# Altium PCB CopterControl 3D.PcbDoc (part 1 of 2)
Units mil, origin at the board's own origin, x right, y up, seen from the top; angles counter-clockwise.
Board outline 1417.32 x 1417.32 mil, 2 copper layers (Top Layer, Bottom Layer), stack 61.2 mil thick; 64 components, 58 nets, 262 pads, 81 vias.
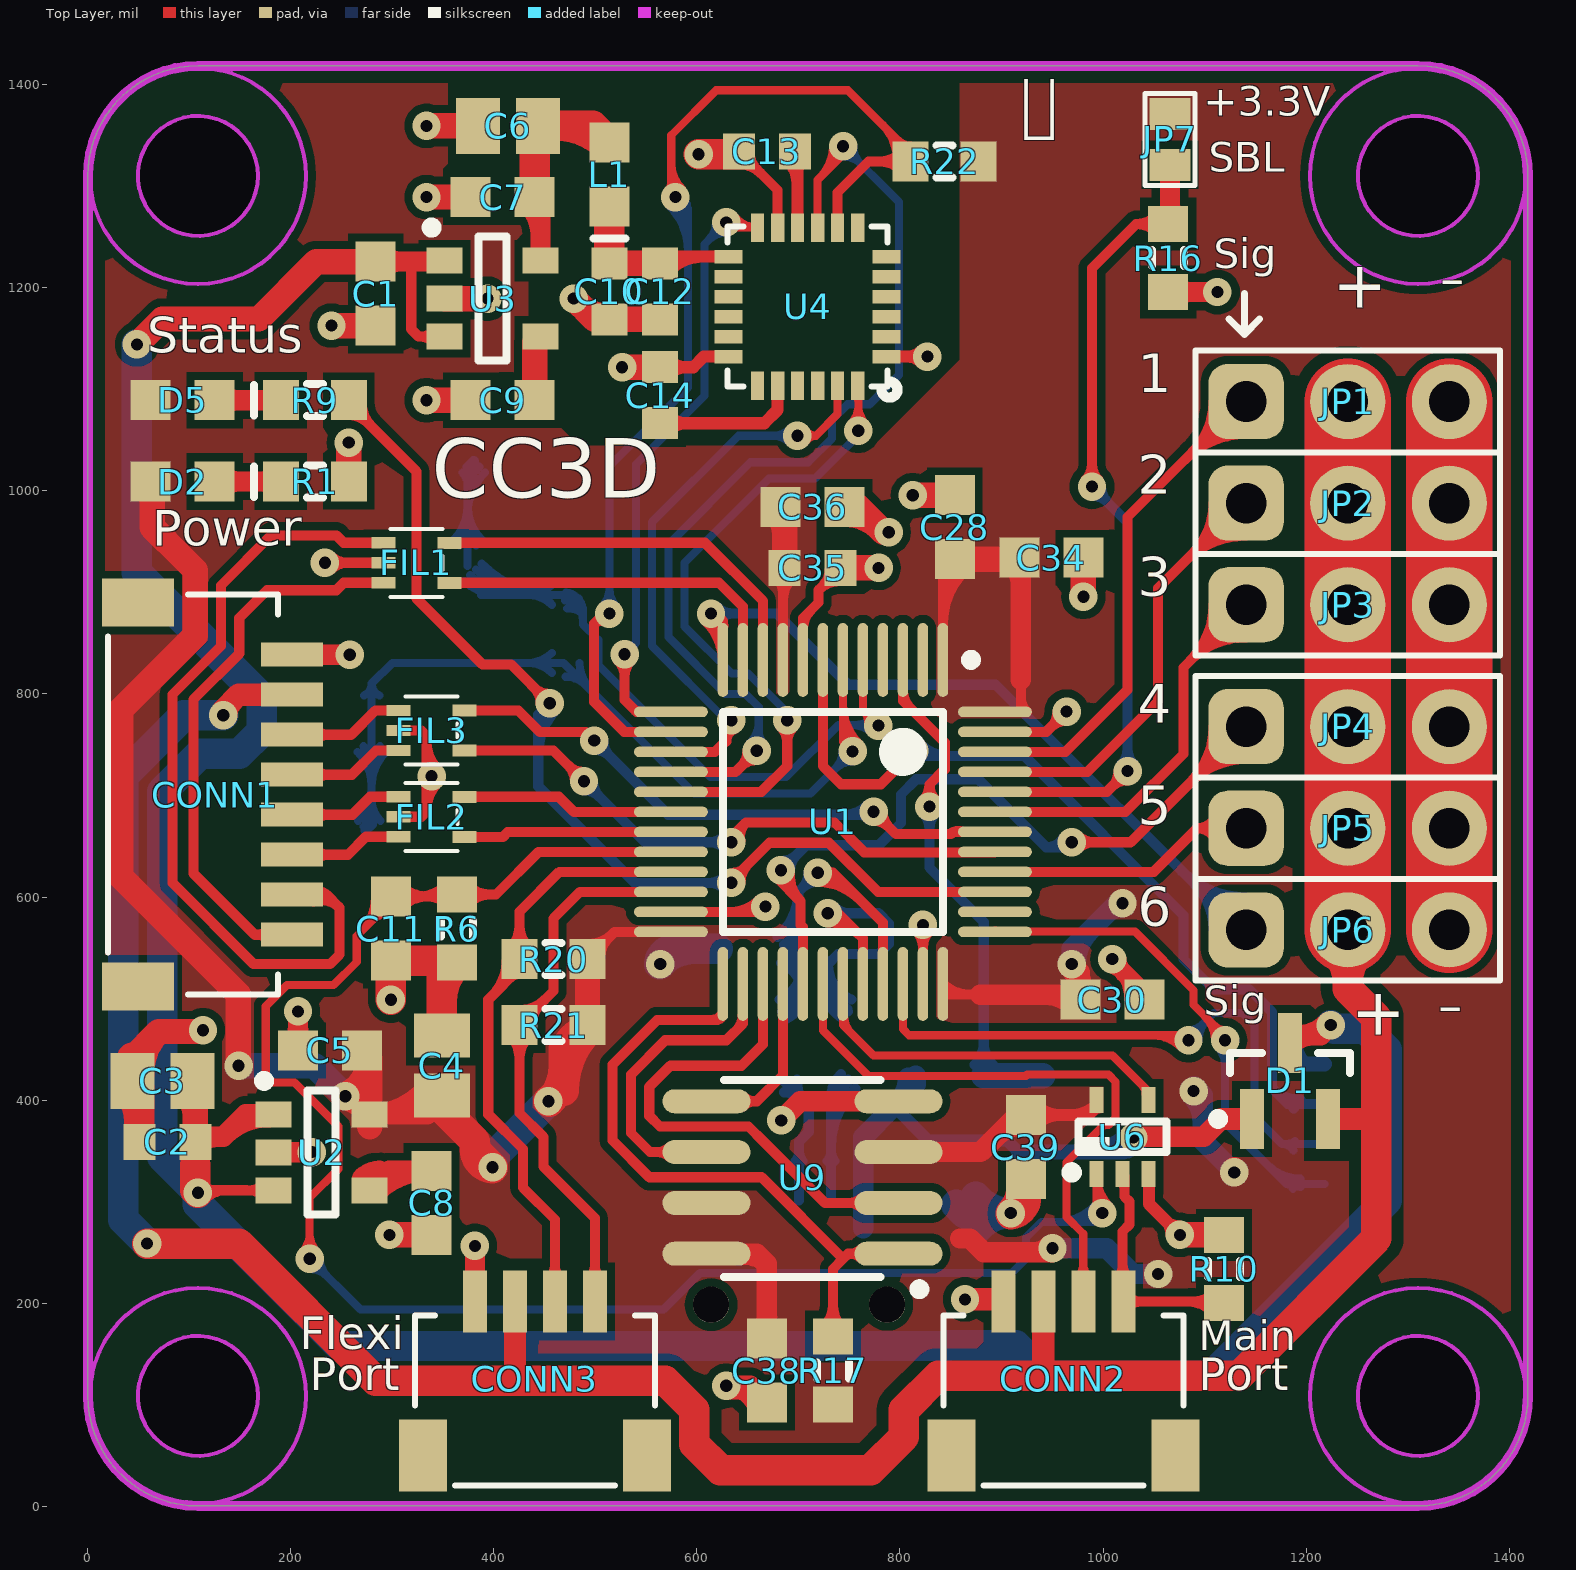
[diagram p0: Top Layer view]
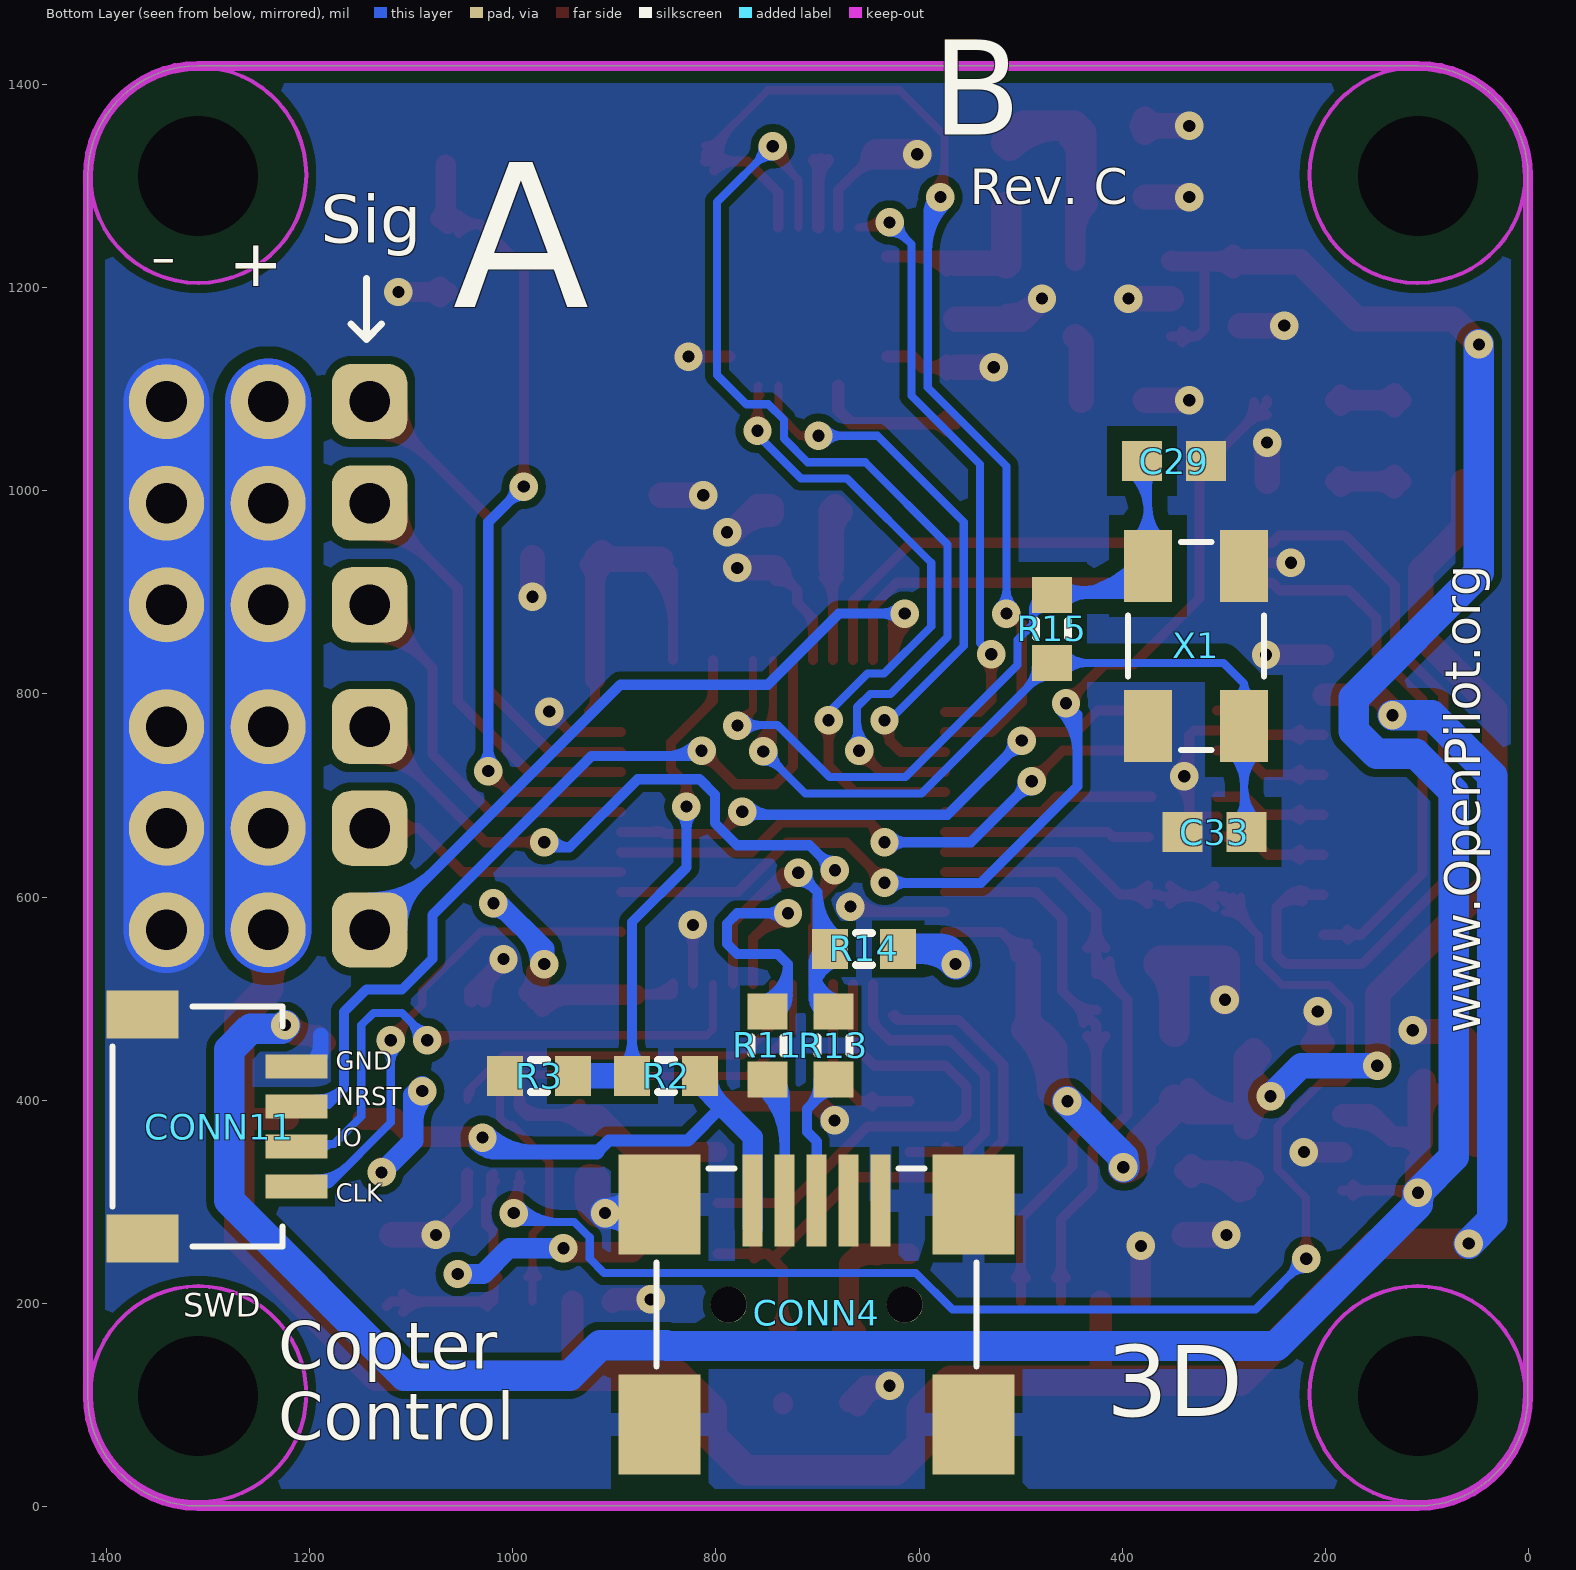
[diagram p1: Bottom Layer view, seen from below]
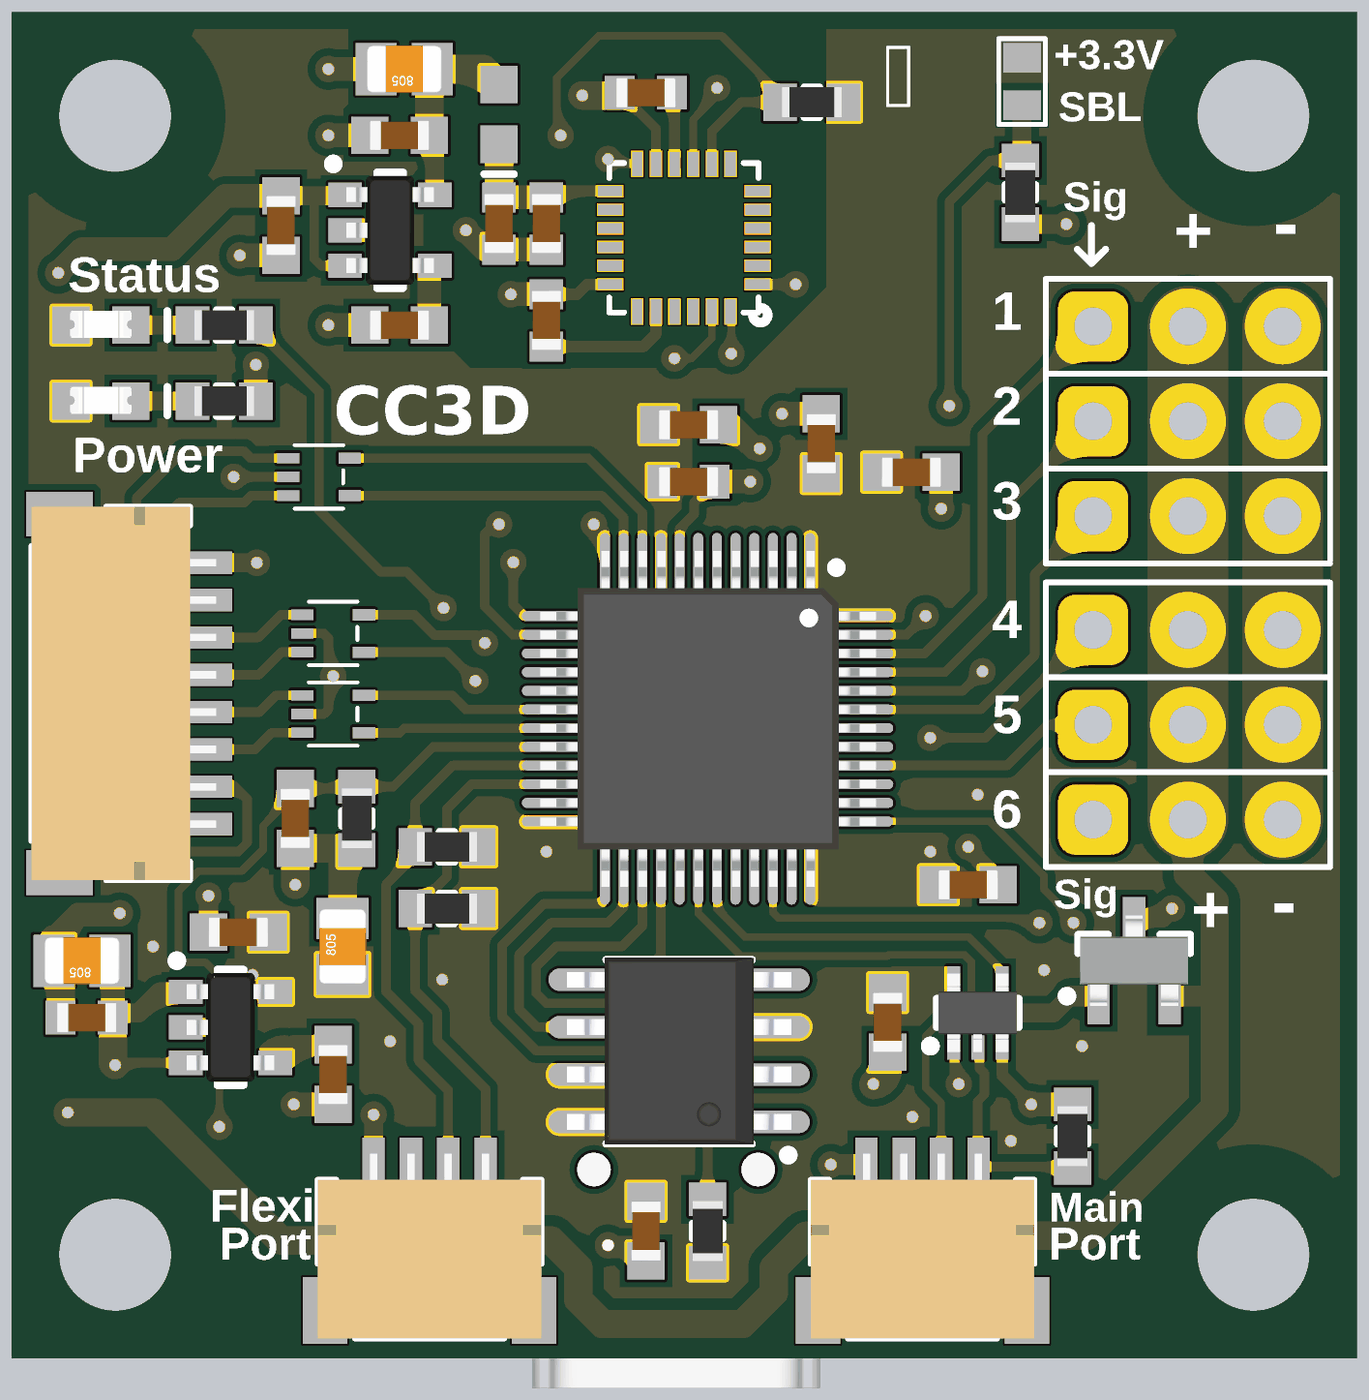
[diagram p3: 3D render of the assembled board from above, using the file's embedded part models]
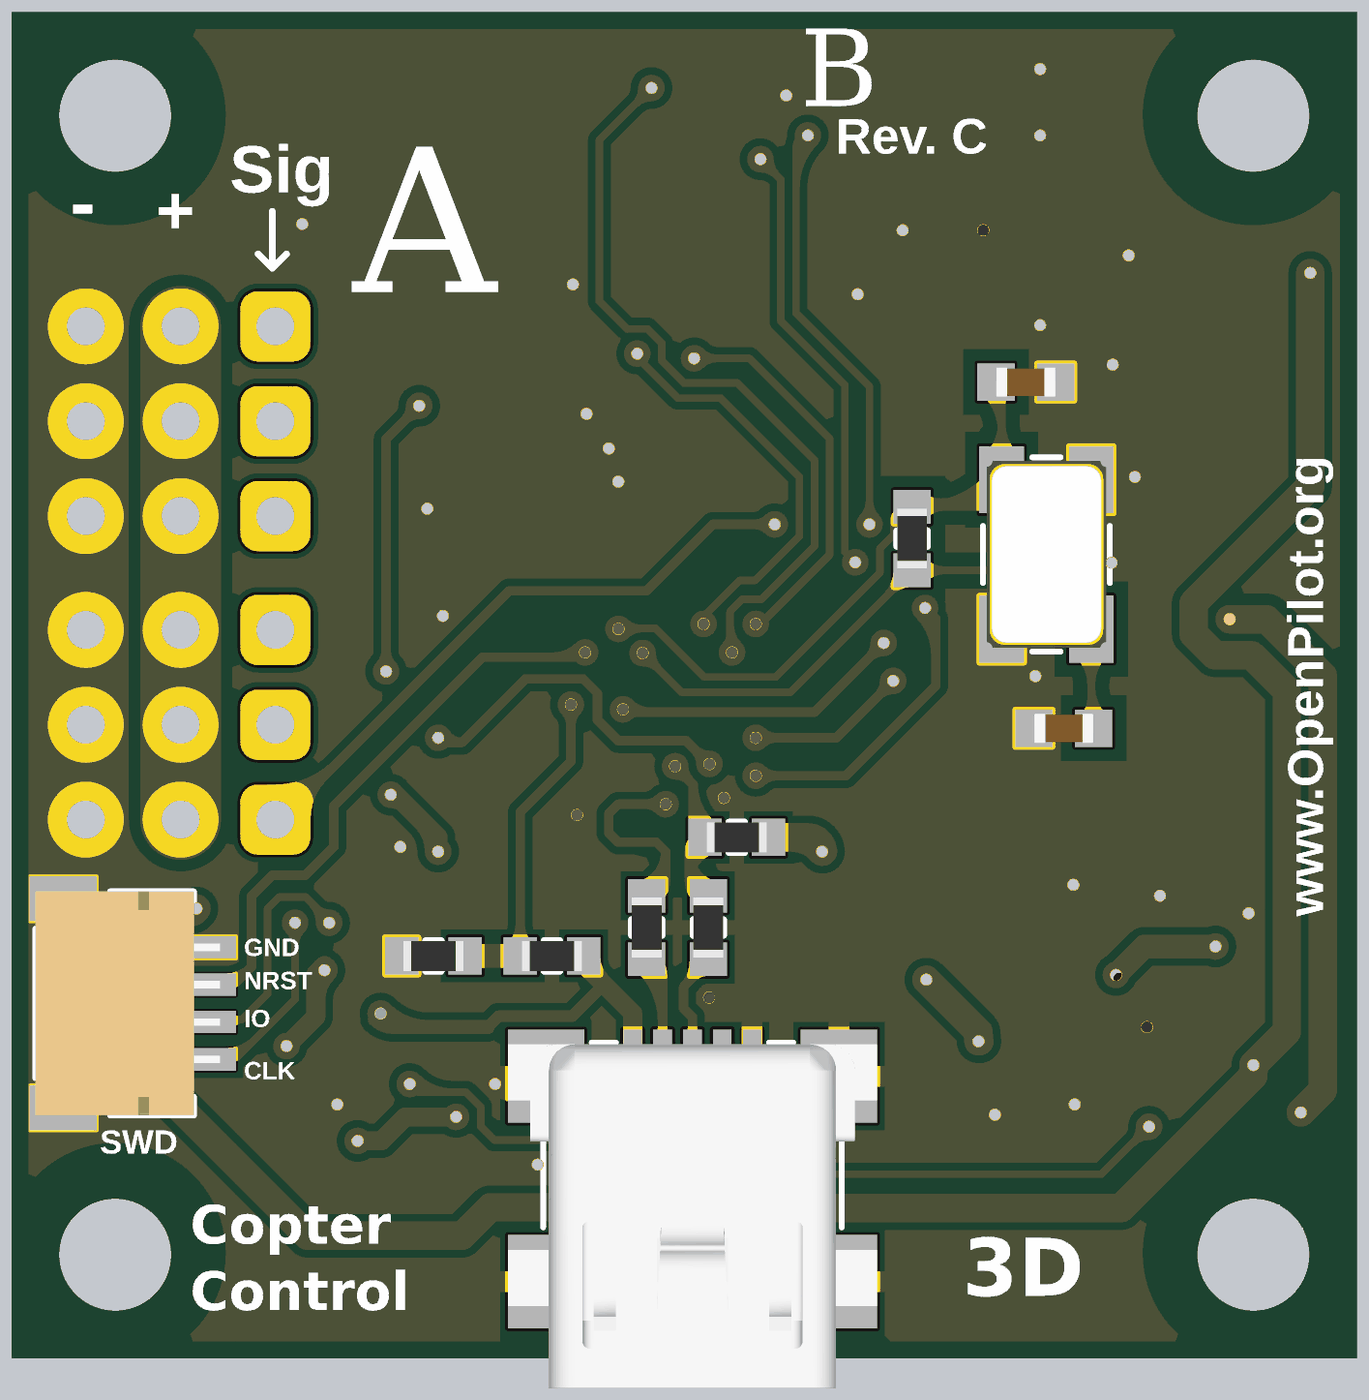
[diagram p4: 3D render of the assembled board from below, using the file's embedded part models]

## Layer stack, top to bottom
Top Layer: signal copper 1.4
Dielectric: core 58.4, FR-4, Dk 4.8
Bottom Layer: signal copper 1.4

## Board outline
0.73,109 ccw(c109,109) 109,0.73 1309.79,0.73 ccw(c1309.79,109) 1418.06,109 1418.06,1309.79 ccw(c1309.79,1309.79) 1309.79,1418.06 109,1418.06 ccw(c109,1309.79) 0.73,1309.79

## Design rules (kind name [scope] priority, off if disabled: settings)
AcuteAngle [All] p1: minimum=6.00000000000000E+0001 checktracksonly=FALSE
Clearance Clearance_osc [InNet('GND') vs InNet('OSC_IN') or InNet('OSC_OUT')] p1: gap=15
Clearance Clearance_outline [All vs OnLayer('Keep-Out Layer')] p2: gap=12
Clearance "VCC_UNREG Pour Clearance" [(InNamedPolygon('Top-VCC') OR InNamedPolygon('Bottom Layer-GND')) vs (InNet('VCC_UNREG'))] p3: gap=12
Clearance "Small Part Clearance" [(HasFootprint('IMU-3000'))] p4: gap=6
Clearance [All] p5: gap=8
ComponentClearance ComponentClearance_servo_headers [InComponent('JP1') or InComponent('JP2') or InComponent('JP3') or InComponent('JP4') or InComponent('JP5') or InComponent('JP6')] p1: gap=5 collisioncheckmode=3 verticalgap=10 showdistances=FALSE
ComponentClearance [All] p2: gap=10 collisioncheckmode=3 verticalgap=10 showdistances=FALSE
DiffPairsRouting [All] p1: maxlimit=20 minlimit=6 mostfreqgap=10 maxuncoupledlength=500
HoleSize [All] p1: absolutevalues=TRUE maxlimit=1000 minlimit=12 maxpercent=80.000 minpercent=20.000
MinimumAnnularRing [All] p1: minimumring=8
MinimumSolderMaskSliver MinimumSolderMaskSliver_FIL1-3 [InComponent('FIL1') or InComponent('FIL2') or InComponent('FIL3')] p1: minsoldermaskwidth=1
MinimumSolderMaskSliver [All] p2: minsoldermaskwidth=3
PlaneClearance [All] p1: clearance=15
PlaneConnect [All] p1: planeconnectstyle=Direct reliefexpansion=20 reliefentries=4 reliefconductorwidth=10 reliefairgap=10
PolygonConnect PolygonConnect_usb [InComponent('CONN4')] p1: connectstyle=Relief reliefconductorwidth=22 reliefentries=4 polygonreliefangle="90 Angle"
PolygonConnect [All] p2: connectstyle=Direct reliefconductorwidth=12 reliefentries=4 polygonreliefangle="90 Angle"
RoutingVias [All] p1: holewidth=15 width=31 viastyle="Through Hole" minholewidth=12 minwidth=28 maxholewidth=28 maxwidth=50
SilkToSilkClearance SilkToSilkClearance_text [IsText] p1: silktosilkclearance=0
SilkToSilkClearance [All] p2: silktosilkclearance=4
SilkscreenOverComponentPads [All] p1: minsilkscreentomaskgap=2
SolderMaskExpansion [All] p1: expansion=3
Width [All] p1: maxlimit=400 minlimit=8 preferedwidth=10
20 further rules are at their usual default settings.

## Classes and differential pairs
differential pair USB_R: +USB_R_P -USB_R_N
differential pair USB_D: +USB_D_P -USB_D_N

## Components (designator, comment, footprint, x,y, rotation, side; value= is the part's Value field where it differs from the comment)
C1 "Cap603" CAP603N 284,1194 r270 top locked
C2 "Cap603" CAP603L 79,359 r180 top locked
C3 "Cap805" CAP805L 74,419 r180 top locked
C4 "Cap805" CAP805L 349,434 r90 top locked
C5 "Cap603" CAP603N 239,449 r180 top locked
C6 "Cap805" CAP805L 414,1359 r180 top locked
C7 "Cap603" CAP603N 409,1289 r180 top locked
C8 "Cap603" CAP603N 339,299 r270 top locked
C9 "Cap603" CAP603N 409,1089 r180 top locked
C10 "Cap603" CAP603L 514,1196.17 r270 top locked
C11 "Cap603" CAP603N 299,569 r270 top locked
C12 "Cap603" CAP603L 564,1196.17 r270 top locked
C13 "Cap603" CAP603L 669,1334 r180 top locked
C14 "Cap603" CAP603L 564,1094 r270 top locked
C28 "Cap603" CAP603N 854,964 r270 top locked
C29 "Cap603" CAP603N 349,1029 r0 bottom locked
C30 "Cap603" CAP603N 1009,499 r180 top locked
C33 "Cap603" CAP603N 309,664 r180 bottom locked
C34 "Cap603" CAP603N 949,934 r180 top locked
C35 "Cap603" CAP603L 714,924 r0 top locked
C36 "Cap603" CAP603N 714,984 r180 top locked
C38 "Cap603" CAP603N 669,134 r270 top locked
C39 "Cap603" CAP603N 924,354 r270 top locked
CONN1 "RC Input" "JST SH 8 Pin Side Entry" 20.73,700.73 r270 top locked
CONN2 "USART 1" "JST SH 4 Pin Side Entry" 960.73,20.73 r0 top locked
CONN3 "Flexi Port" "JST SH 4 Pin Side Entry" 440.73,20.73 r0 top locked
CONN4 "USB" "USB SMD" 700.73,80.73 r180 bottom locked
CONN11 "SWD" "JST SH 4 Pin Side Entry" 1394,374 r270 bottom
D1 "BAT54C" SOT23-3N 1184,419 r90 top locked
D2 "Green" LED603N 94,1009 r180 top locked
D5 "Blue" LED603N 94,1089 r180 top locked
FIL1 "IP4256CZ5-W,115" SOT-665 324,929 r0 top locked
FIL2 "IP4256CZ5-W,115" SOT-665 339,679 r0 top locked
FIL3 "IP4256CZ5-W,115" SOT-665 339,764 r0 top locked
JP1 "Servo out 1" "SIP3 - 0.1" 1140.73,1087.73 r0 top locked
JP2 "Servo out 2" "SIP3 - 0.1" 1140.73,987.73 r0 top locked
JP3 "Servo out 3" "SIP3 - 0.1" 1140.73,887.73 r0 top locked
JP4 "Servo out 4" "SIP3 - 0.1" 1140.73,767.73 r0 top locked
JP5 "Servo out 5" "SIP3 - 0.1" 1140.73,667.73 r0 top locked
JP6 "Servo out 6" "SIP3 - 0.1" 1140.73,567.73 r0 top locked
JP7 "2 PAD Touch JMP" "TOUCH JMP 2PAD" 1065.73,1345.73 r180 top locked
L1 "FB 300mA" IND603N 514,1311.17 r90 top locked
R1 "Res603" RES603N 224,1009 r180 top locked
R2 "Res603" RES603N 849,424 r0 bottom locked
R3 "Res603" RES603N 974,424 r180 bottom locked
R6 "Res603" RES603N 364,569 r90 top locked
R9 "Res603" RES603N 224,1089 r0 top locked
R10 "Res603" RES603N 1119,234 r270 top locked
R11 "Res603" RES603N 749,454 r270 bottom locked
R13 "Res603" RES603N 684,454 r270 bottom locked
R14 "Res603" RES603N 654,549 r0 bottom locked
R15 "Res603" RES603N 469,864 r90 bottom locked
R16 "Res603" RES603N 1064,1229 r90 top locked
R17 "Res603" RES603N 734,134 r90 top locked
R20 "Res603" RES603N 459,539 r0 top locked
R21 "Res603" RES603N 459,474 r0 top locked
R22 "Res603" RES603N 844,1324 r0 top locked
U1 "STM32F103CBT6" "STM32 48 Lead" 734,674 r270 top locked
U2 "LP2992-3.3" SOT23-5L 230.73,348.73 r0 top locked
U3 "LP2992-3.3" SOT23-5L 399,1189 r0 top locked
U4 "MPU-6000" IMU-3000 709,1181.17 r180 top locked
U6 "XOR" DCK-5 1019,364 r90 top locked
U9 "Flash 16Mbits" SOIC8_N 704,324 r180 top locked
X1 "8MHz" "XTAL ACT530SMX-4 Series" 327.27,847.27 r90 bottom locked

## Footprints (in the part's own frame and the unit in brackets; to place one, negate y for a bottom-side part, rotate by r counter-clockwise, add the part's x,y. Pads: shape width x height; smd on the part's side, far side on the other; paste and mask are expansions set on the pad)
CAP603L [mm] "Chip Capacitor, Body 1.6x0.8mm, IPC High Density"
  rect 0.8x0.9 smd: 1(-0.7,0) 2(0.7,0)
  body extent -0.8,-0.4 0.8,0.4, height 0.77
CAP603N [mm] "Chip Capacitor, Body 1.6x0.8mm, IPC Medium Density"
  rect 1x1 smd: 1(-0.8,0) 2(0.8,0)
  body extent -0.8,-0.4 0.8,0.4, height 0.77
CAP805L [mm] "Chip Capacitor, Body 2.0x1.3mm, IPC High Density"
  rect 1.1x1.4 smd: 1(-0.75,0) 2(0.75,0)
  body extent -1,-0.62 1,0.63, height 0.78
DCK-5 [mm] "SOT23-DCK, 5-Leads, Body 2.2x2.4mm (max), Pitch 0.65mm, IPC High Density"
  rect 0.65x0.35 smd mask+0.076: 1(-0.925,0.65) 2(-0.925,0) 3(-0.925,-0.65) 4(0.925,-0.65) 5(0.925,0.65)
  silkscreen extent -0.45,-1.1 0.38,1.1, body extent -1.05,-1.05 1.05,1.05, height 1
IMU-3000 [mm]
  rect 0.711x0.337 smd paste-0.03 mask+0.04: 1(-1.975,1.25) 2(-1.975,0.75) 3(-1.975,0.25) 4(-1.975,-0.25) 5(-1.975,-0.75) 6(-1.975,-1.25) 13(1.975,-1.25) 14(1.975,-0.75) 15(1.975,-0.25) 16(1.975,0.25) 17(1.975,0.75) 18(1.975,1.25)
  rect 0.337x0.711 smd paste-0.03 mask+0.04: 7(-1.25,-1.975) 8(-0.75,-1.975) 9(-0.25,-1.975) 10(0.25,-1.975) 11(0.75,-1.975) 12(1.25,-1.975) 19(1.25,1.975) 20(0.75,1.975) 21(0.25,1.975) 22(-0.25,1.975) 23(-0.75,1.975) 24(-1.25,1.975)
  silkscreen extent -2.25,-2 2,2.27, body extent -2,-2 2,2, height 0.95
IND603N [mm] "Chip Inductor, Body 1.6x0.8mm, IPC Medium Density"
  rect 1x1 smd: 1(-0.8,0) 2(0.8,0)
  silkscreen extent -1.6,-0.4 -1.6,0.4, body extent -0.87,-0.48 0.87,0.48, height 0.71
"JST SH 4 Pin Side Entry" [mm] "SM04B-SRSS-TB"
  rect 1.2x1.8 smd paste+0 mask+0.051: 0(-2.8,0.75) 0(2.8,0.75)
  rect 0.6x1.55 smd paste+0 mask+0.051: 1(-1.5,4.6) 2(-0.5,4.6) 3(0.5,4.6) 4(1.5,4.6)
  silkscreen extent -3,0 3,4.25, body extent -3,0 3,4.95, height 2.92
"JST SH 8 Pin Side Entry" [mm] "SM08B-SRSS-TB"
  rect 1.2x1.8 smd paste+0 mask+0.051: 0(-4.8,0.75) 0(4.8,0.75)
  rect 0.6x1.55 smd paste+0 mask+0.051: 1(-3.5,4.6) 2(-2.5,4.6) 3(-1.5,4.6) 4(-0.5,4.6) 5(0.5,4.6) 6(1.5,4.6) 7(2.5,4.6) 8(3.5,4.6)
  silkscreen extent -5,0 5,4.25, body extent -5,0 5,4.95, height 2.92
LED603N [mm] "Chip LED, Body 1.6x0.8mm, IPC Medium Density"
  rect 1x1 smd: 1(-0.8,0) 2(0.8,0)
  silkscreen extent -1.78,-0.38 -1.78,0.38, body extent -0.82,-0.38 0.82,0.34, height 0.68
RES603N [mm] "Chip Resistor, Body 1.6x0.8mm, IPC Medium Density"
  rect 0.9x1 smd: 1(-0.85,0) 2(0.85,0)
  silkscreen extent -0.2,-0.4 0.2,0.4, body extent -0.8,-0.4 0.8,0.4, height 0.44
"SIP3 - 0.1" [mil] "Standard 0.1 3 Pin Header"
  rrect50% 74x74 hole 40: 1(0,0)
  round 74 hole 40: 2(100,0) 3(200,0)
  silkscreen extent -50,-50 250,50, body extent -47,-47 248,47, height 394
SOIC8_N [mm] "8-Pin Small Outline Integrated Circuit Package (SOIC8), IPC Medium Density"
  oval 2.2x0.6 smd: 1(-2.4,1.905) 2(-2.4,0.635) 3(-2.4,-0.635) 4(-2.4,-1.905) 5(2.4,-1.905) 6(2.4,-0.635) 7(2.4,0.635) 8(2.4,1.905)
  silkscreen extent -3.05,-2.44 1.96,2.92, body extent -3.01,-2.5 3.01,2.5, height 1.75
SOT23-3N [mm] "SOT23, 3-Leads, Body 2.9x1.3mm, Pitch 0.95mm, Lead Span 2.5mm, IPC Medium Density"
  rect 1.5x0.6 smd: 1(-0.95,0.95) 2(-0.95,-0.95) 3(0.95,0)
  silkscreen extent -1.07,-1.5 0.7,1.92, body extent -1.21,-1.45 1.21,1.45, height 0.99
SOT23-5L [mm] "SOT23, 5-Leads, Body 2.9x1.6mm, Pitch 0.95mm, Lead Span 2.8mm, IPC High Density"
  rect 0.9x0.65 smd mask+0.076: 1(-1.2,0.95) 2(-1.2,0) 3(-1.2,-0.95) 4(1.2,-0.95) 5(1.2,0.95)
  silkscreen extent -1.56,-1.55 0.35,1.91, body extent -1.17,-1.46 1.17,1.46, height 0.97
SOT-665 [mm] "NXP SOT665"
  rect 0.6x0.28 smd mask+0.076: 1(-0.825,0.5) 2(-0.825,0) 3(-0.825,-0.5)
  rect 0.6x0.3 smd mask+0.076: 4(0.825,-0.5) 5(0.825,0.5)
  silkscreen extent -0.65,-0.85 0.65,0.85, body extent -0.65,-0.85 0.65,0.85, height 0.6
"STM32 48 Lead" [mm] "Thin QFP, 48-Leads, Body 7x7mm, Pitch 0.5mm, IPC Medium Density"
  oval 1.85x0.265 smd mask+0.076: 1(-4.05,2.75) 2(-4.05,2.25) 3(-4.05,1.75) 4(-4.05,1.25) 5(-4.05,0.75) 6(-4.05,0.25) 7(-4.05,-0.25) 8(-4.05,-0.75) 9(-4.05,-1.25) 10(-4.05,-1.75) 11(-4.05,-2.25) 12(-4.05,-2.75) 25(4.05,-2.75) 26(4.05,-2.25) 27(4.05,-1.75) 28(4.05,-1.25) 29(4.05,-0.75) 30(4.05,-0.25) 31(4.05,0.25) 32(4.05,0.75) 33(4.05,1.25) 34(4.05,1.75) 35(4.05,2.25) 36(4.05,2.75)
  oval 0.265x1.85 smd mask+0.076: 13(-2.75,-4.05) 14(-2.25,-4.05) 15(-1.75,-4.05) 16(-1.25,-4.05) 17(-0.75,-4.05) 18(-0.25,-4.05) 19(0.25,-4.05) 20(0.75,-4.05) 21(1.25,-4.05) 22(1.75,-4.05) 23(2.25,-4.05) 24(2.75,-4.05) 37(2.75,4.05) 38(2.25,4.05) 39(1.75,4.05) 40(1.25,4.05) 41(0.75,4.05) 42(0.25,4.05) 43(-0.25,4.05) 44(-0.75,4.05) 45(-1.25,4.05) 46(-1.75,4.05) 47(-2.25,4.05) 48(-2.75,4.05)
  silkscreen extent -4.17,-2.75 2.75,3.58, body extent -4.5,-4.49 4.5,4.51, height 1.56
"TOUCH JMP 2PAD" [mil] "Touch Jumper 2 Pad"
  rect 40x31.5 smd mask+0: 1(0,25) 2(0,-25)
  silkscreen extent -25,-45 25,45
"USB SMD" [mm] "DX2R005HN2E700"
  rect 2.05x2.5 smd: 0(-3.925,0) 0(-3.925,5.5) 0(3.925,0) 0(3.925,5.5)
  rect 0.5x2.3 smd mask+0.085: 1(-1.6,5.6) 2(-0.8,5.6) 3(0,5.6) 4(0.8,5.6) 5(1.6,5.6)
  round 0.9 hole 0.9 unplated: 6(-2.2,3) 6(2.2,3)
  silkscreen extent -4,1.45 4,6.4, body extent -4.95,-2.85 4.95,6.35, height 4.17
"XTAL ACT530SMX-4 Series" [mm] "ACT530SMX-4Series from ACT"
  rect 1.8x1.2 smd: 1(-2,-1.2) 2(2,-1.2) 3(2,1.2) 4(-2,1.2)
  silkscreen extent -2.6,-1.7 2.6,1.7, body extent -2.5,-1.6 2.5,1.6, height 1

## Part data
C1 C2 C3 C4 C5 C6 C7 C8 C9 C10 C11 C12 C13 C14 C28 C29 C30 C33 C34 C35 C36 C38 C39: "Capacitor SMD"
CONN1: library part "JST-SH 8-pin Side Entry Socket", "JST-SH 8-pin Side Entry Socket"
CONN2 CONN3 CONN11: library part "JST-SH 4-pin Side Entry Socket", "JST-SH 4-pin Side Entry Socket"
CONN4: library part USB_SMT_B, "USB Type-B SMT Socket"
D1: "Dual Diode Command Cathode"
D2: library part "LED 603 Gr", "Green 603 LED"
D5: library part "LED 603 Bl", "Blue 603 LED"
FIL1 FIL2 FIL3: library part "RF Filter 100R 30pF", "IP4256CZ5-W,115 2 channel, 100R, 30pF, RF ESD Filter"
JP1 JP2 JP3 JP4 JP5 JP6: library part "Hdr 3 Pin 0.1", "Header, 3-Pin, 0.1\""
JP7: "2 Pad Touch Jumper"
L1: library part FerriteBead_300mA, "Ferrite Bead 300mA"
R1 R2 R3 R6 R9 R10 R11 R13 R14 R15 R16 R17 R20 R21 R22: "Resistor SMD"
U1: "STM32 ARM-based 32-bit MCU with 128 Kbytes Flash, 48-pin LQFP, Industrial Temperature"
U2 U3: library part LP2985-3.3, "3.3V 250mA LDO Regulator"
U4: library part MPU-3/6000, "Invensense MPU-3/6000,  3-axis Gyros & Accel on 6000"
U6: library part "XOR SN74LVC1G86DCKR", "XOR Gate SN74LVC1G86DCKR"
U9: library part "Flash 16Mb 75MHZ 8SOIC", "16Mbit SPI Flash Memory"
X1: library part "XTAL ACT530SMX-4", "Surface Mount Quartz Crystal, Digikey 535-9720-1-ND"

## Free pads (board coordinates)
  round 0 hole 118.11 unplated: 0(109,109) 0(109,1309.79) 0(1309.79,109) 0(1309.79,1309.79)

## Via types
v1: diameter 28, hole 12, Top Layer to Bottom Layer, tented both sides, 81 vias

## Nets (pads, with @x,y where several pads share a name; then routed paths per layer and width w, separated by ;. In a path a pad name is that pad's centre, name@x,y a point inside that pad or via, vN(x,y) a via of type N, cw(c..) or ccw(c..) an arc to the next point about the centre after c; other vN are vias at no path point)
BOOT: JP7.1 R16.2 U1.44 | length 1011.8
  Top Layer w10: U1.44@893.45,703.53 1003.53,703.53 v1(1024,724) ; v1@982.64,1010.36 ccw(c967.27,1025.73) 989,1025.73 ccw(c1010.73,1025.73) v1@995.36,1010.36 ; v1(989,1004) 989,1219 1032.47,1262.47 ; v1@1015,724 cw(c993.27,724) 1008.64,708.64 cw(c1024,693.27) v1@1024,715 ; R16.2@1052.8,1253.72 ccw(c1032.47,1234.46) 1032.47,1262.47 ; R16.2@1052.8,1271.21 cw(c1032.47,1290.47) 1032.47,1262.46 ; R16.2@1064,1262.47 1032.47,1262.47
  Top Layer w20: R16.2@1060.51,1267.92 ccw(c1047.91,1280.53) 1065.73,1280.53 ; R16.2@1064,1262.47 1065.73,1264.2 JP7.1@1065.73,1320.73 ; 1065.73,1281.66 ccw(c1085.17,1281.66) R16.2@1071.42,1267.92
  Bottom Layer w10: v1@989,995 cw(c989,973.27) 1004.36,988.64 cw(c1019.73,1004) v1@998,1004 ; v1(989,1004) 1024,969 v1(1024,724) ; v1@1017.64,730.36 ccw(c1002.27,745.73) 1024,745.73 ccw(c1045.73,745.73) v1@1030.36,730.36
CS_FLSH: R17.2 U1.25 U9.1 | length 708.6
  Top Layer w10: 614.71,479 ccw(c614.71,494.38) U1.25@625.58,483.5 ; U1.25@624,484 619,479 ; U1.25@625.53,483.43 cw(c619,486.03) 619,479 ; R17.2@725.01,176.46 ccw(c703.3,198.17) 734,198.17 ccw(c764.7,198.17) R17.2@742.99,176.46 ; R17.2@734,167.47 734,234 744,244 ; U9.1@762.18,244.18 ccw(c750.55,232.56) 750.55,249 ccw(c750.55,265.44) U9.1@762.18,253.82 ; U9.1@798.49,249 749,249 744,244 ; 619,479 561,479 517.2,435.2 517.2,360.34 553.36,324.19 663.81,324.19 744,244
GND: C1.2 C2.2 C3.2 C4.2 C5.2 C6.2 C7.2 C8.2 C9.2 C10.2 C11.2 C12.2 C13.2 C14.1 C28.1 C29.1 C30.1 C33.1 C34.1 C35.2 C36.1 C38.2 C39.2 CONN1.1 CONN2.1 CONN3.1 CONN4.0 CONN4.5 CONN11.0 CONN11.1 FIL1.2 FIL2.2 FIL3.2 JP1.3 JP2.3 JP3.3 JP4.3 JP5.3 JP6.3 R1.1 R3.1 R6.1 R10.1 R16.1 U1.8 U1.23 U1.35 U1.47 U2.2 U3.2 U4.1 U4.11 U4.18 U6.3 U9.4 X1.2 X1.4 | length 4595.5
  Top Layer w10: v1(234,929) FIL1.2@291.52,929 ; v1@240.36,922.64 cw(c255.73,907.27) 255.73,929 cw(c255.73,950.73) v1@240.36,935.36 ; FIL2.2@306.52,679 329,679 334,684 v1@334,719 ; FIL3.2@306.52,764 329,764 334,759 v1@334,719 ; 334,685.2 cw(c372.8,685.2) v1@345.36,712.64 ; 334,752.8 ccw(c372.8,752.8) v1@345.36,725.36 ; v1(339,719) v1@334,719 ; U1.23@574.55,585.42 662.32,585.42 v1(667.58,590.68) ; 633.14,585.42 ccw(c633.14,625.13) v1@661.22,597.05 ; C13.2@641.44,1321.28 cw(c641.44,1290.58) 663.15,1312.29 ; C13.2@641.44,1334 679.47,1295.97 U4.11@679.47,1258.92 ; C13.2@652.19,1332.03 ccw(c673.38,1332.03) 658.4,1317.04 ; U1.8@704.47,833.45 704.47,874.47 719.87,889.87 719.87,902.31 ; U1.8@704.69,864.65 cw(c728.92,864.65) 711.79,881.79 ; 724.6,907.04 ccw(c709.62,922.03) C35.2@730.81,922.03 ; C35.2@741.55,911.28 ccw(c741.53,880.64) 719.87,902.31 ; C35.2@741.56,924 719.87,902.31 ; v1@816.22,566.22 cw(c800.86,550.86) 822.58,550.86 cw(c844.31,550.86) v1@828.95,566.22 ; U1.35@822.58,514.55 v1(822.58,572.58) ; U1.47@893.45,762.58 944.08,762.58 v1(964,782.5) ; v1@955,782.5 cw(c933.27,782.5) 948.64,767.14 cw(c964,751.77) v1@964,773.5
  Top Layer w12: C14.1@564,1121.56 596.56,1121.56 606.95,1131.95 U4.18@631.24,1131.95 ; C14.1@572.86,1114.67 cw(c589.5,1098.02) 589.5,1121.56 cw(c589.5,1145.09) C14.1@572.86,1128.45 ; U4.1@786.76,1131.95 v1(826.95,1131.95) ; v1@821.3,1126.3 ccw(c807.64,1112.64) 807.64,1131.95 ccw(c807.64,1151.27) v1@821.3,1137.61 ; U6.3@1044.59,327.58 1045,327.17 1045,298 v1(1075.54,267.46) ; v1@1067.54,267.46 ccw(c1048.22,267.46) 1061.88,281.12 ccw(c1075.54,294.78) v1@1075.54,275.46
  Top Layer w15: v1@1007.32,532.72 cw(c1001.74,511.91) 1020.4,522.68 ; v1@1009,532.5 cw(c1009,516.81) 1020.1,527.9 cw(c1031.19,539) v1@1015.5,539 ; v1(1009,539) 1040.5,507.5 C30.1@1040.5,499 ; v1@1013.68,534.32 cw(c978.37,499) C30.1@1028.31,499
  Top Layer w20: U2.2@183.49,348.73 223.73,348.73 223.47,349 v1(221.23,349) ; C5.2@200.65,455.85 ccw(c184.12,472.38) 207.5,472.38 ccw(c230.88,472.38) C5.2@214.35,455.85 ; CONN1.1@201.84,838.53 v1(258.53,838.53) ; C5.2@207.5,449 v1(207.5,487.5) ; CONN3.1@381.68,201.84 v1(381.68,256.68) ; v1@629.67,115.06 cw(c637.17,70.68) C38.2@669,102.5 652.5,119 v1(629,119) cw(c629,85.04) C38.2@660.12,98.63 ; v1(683.14,380.14) 702,399 U9.4@798.49,399 ; R16.1@1064,1195.53 v1(1112.47,1195.53) ; R16.1@1071.42,1190.08 cw(c1084.6,1176.91) 1084.6,1195.53 cw(c1084.6,1214.16) R16.1@1071.42,1200.99
  Top Layer w22: v1(864,204) 899.51,204 CONN2.1@901.68,201.84
  Top Layer w25: C3.2@44.47,441.69 70.42,467.63 ; C3.2@53.62,425.2 cw(c111.04,427.01) 70.42,467.63 ; v1(114,469) 112.63,467.63 70.42,467.63 ; v1(240.5,1162.5) C1.2@284,1162.5 ; R1.1@257.47,1009 v1(257.47,1047.28) ; v1(297.5,267.5) C8.2@339,267.5 ; v1(334,1089) C9.2@377.5,1089 ; v1(334,1289) C7.2@377.5,1289 ; v1(334,1359) C6.2@380.53,1359 ; U3.2@351.76,1189 v1(394,1189) ; C6.2@378,1352.53 ccw(c362.37,1336.9) 362.37,1359 ccw(c362.38,1381.1) C6.2@378,1365.47 ; v1(479,1189) 499.39,1168.61 C10.2@514,1168.61 C12.2@564,1168.61 ; v1@484.91,1183.09 ccw(c512.03,1210.2) C10.2@512.03,1171.85 ; v1(526.44,1121.56) C14.1@564,1121.56 ; C35.2@741.56,924 v1(779,924) ; C36.1@745.5,976.82 cw(c745.5,926.87) v1@780.81,962.19 ; C36.1@745.5,984 759,984 784,959 v1(789,959) ; v1(812.5,995.5) C28.1@854,995.5 ; v1(980.5,895.5) C34.1@980.5,934 ; v1(1075.54,267.46) R10.1@1119,267.46
  Top Layer w30: C3.2@39.77,408.39 cw(c11.59,380.21) 51.44,380.21 ; C3.2@44.47,441.69 C3.2@44.47,419 51.44,412.03 C2.2@51.44,359 ; v1(299,499) C11.2@299,537.5 362.03,537.5 R6.1@364,535.54 349,520.54 C4.2@349,467.46 ; 349,497.52 cw(c400.05,497.52) R6.1@363.95,533.61 ; v1(601.84,1331.16) C13.2@641.44,1331.16 ; v1@909.07,288 ccw(c907.96,304) C39.2@924,304 ; v1@909.7,288.29 ccw(c875.92,322.5) C39.2@924,322.5 C39.2@924,304 ; C39.2@919.38,321.71 cw(c882.63,315.38) v1(909,289) C39.2@924,304
  Top Layer w50: JP1.3@1340.73,1087.73 JP1.3@1340.73,1094.51
  Top Layer w85: JP6.3@1340.73,567.73 JP5.3@1340.73,667.73 JP4.3@1340.73,767.73 JP3.3@1340.73,887.73 JP2.3@1340.73,987.73 JP1.3@1340.73,1087.73
  Bottom Layer w10: v1(667.58,590.68) v1@669,589.27 ; v1@679,376 v1(683.14,380.14)
  Bottom Layer w15: 1189,456.01 ccw(c1217.15,456.01) CONN11.1@1197.25,436.1 ; 1189,464 1189,444 1197.21,435.79 CONN11.1@1217.9,435.79
  Bottom Layer w30: CONN4.0@855.26,297.27 863.53,289 v1(909,289) ; CONN4.0@874.53,304.88 ccw(c909,334.33) v1(909,289) ; CONN4.0@875.11,272.64 cw(c909,245.73) v1(909,289)
  Bottom Layer w35: JP6.3@1340.73,560.73 JP6.3@1340.73,567.73
  Bottom Layer w85: JP6.3@1340.73,567.73 JP5.3@1340.73,667.73 JP4.3@1340.73,767.73 JP3.3@1340.73,887.73 JP2.3@1340.73,987.73 JP1.3@1340.73,1087.73
GYRO_CS#: R22.1 U1.14 U4.8 | length 1434.6
  Top Layer w8: v1@571.93,1296.07 ccw(c564.91,1303.09) 574.84,1303.09 ; 574.84,1303.88 ccw(c593.88,1303.88) v1@580.41,1290.41 ; 574.84,1323.2 ccw(c613.2,1323.2) v1@586.07,1296.07 ; v1(579,1289) 574.84,1293.16 574.84,1349.84 619.06,1394.06 748.94,1394.06 810.54,1332.46 R22.1@810.54,1324 ; 782.53,1360.47 cw(c748.02,1325.97) R22.1@796.82,1325.97 ; 796.18,1346.82 cw(c775.34,1325.97) R22.1@804.82,1325.97 ; 798.21,1344.79 ccw(c810.54,1357.12) R22.1@810.54,1339.68
  Top Layer w10: v1@509,879 499,869 ; v1@510.1,870.89 ccw(c505.88,862.12) 499,869 ; U1.14@574.55,762.58 528.6,762.58 499,792.18 499,869 ; U4.8@739,1259.39 U4.8@738.53,1258.92 738.53,1293.53 769,1324 R22.1@810.54,1324 ; R22.1@801.54,1315.01 ccw(c779.84,1293.3) 779.84,1324 ccw(c779.84,1354.7) R22.1@801.54,1332.99
  Bottom Layer w8: v1@506.93,886.07 ccw(c489.86,903.14) 514,903.14 ccw(c538.14,903.14) v1@521.07,886.07 ; v1(514,879) 514,1024 591.5,1101.5 591.5,1276.5 v1(579,1289) ; v1@571.93,1281.93 cw(c524.68,1234.68) 591.5,1234.68 ; v1@577.59,1287.59 cw(c543.99,1253.99) 591.5,1253.99 ; v1@583.24,1293.24 cw(c563.31,1273.31) 591.5,1273.31
GYRO_INT#: U1.13 U4.12 | length 713.4
  Top Layer w8: v1(629,1264) 634.08,1258.92 U4.12@659.79,1258.92 cw(c659.79,1287.89) v1@636.9,1270.13 ; v1@630.58,1265.23 ccw(c643.45,1275.21) 643.45,1258.92
  Top Layer w10: v1@522.64,832.64 cw(c507.27,817.27) 529,817.27 cw(c550.73,817.27) v1@535.36,832.64 ; v1(529,839) 529,794 540.73,782.27 U1.13@574.55,782.27 ; 538.51,784.49 ccw(c543.35,789.33) U1.13@543.35,782.48
  Bottom Layer w8: v1(529,839) 540,850 540,1025.96 607.5,1093.46 607.5,1242.5 v1(629,1264) ; v1@619,1264 cw(c594.86,1264) 611.93,1246.93 cw(c629,1229.86) v1@629,1254
GYRO_VDD: C10.1 C12.1 L1.1 U4.13 | length 212.3
  Top Layer w12: C12.1@564,1223.72 570.66,1230.38 U4.13@631.24,1230.38 ; C12.1@572.86,1216.83 cw(c605.57,1184.12) 605.57,1230.38
  Top Layer w25: C10.1@514,1223.73 C12.1@564,1223.72
  Top Layer w30: C10.1@514,1223.73 L1.1@514,1279.67
INV: C11.1 R6.2 U1.20 U6.1 | length 2129.8
  Top Layer w8: v1@211.93,251.07 ccw(c194.86,268.14) 219,268.14 ccw(c243.14,268.14) v1@226.07,251.07 ; v1(219,244) 219,304 247.23,332.23 247.23,374 203.92,417.31 182.85,417.31 175.82,424.34 175.82,492.59 196.73,513.5 242.54,513.5 265.31,536.27 265.31,561.57 C11.1@299,595.26 ; 268.52,564.78 ccw(c232.8,600.5) C11.1@283.31,600.5 ; 281.16,577.42 cw(c299,559.59) C11.1@299,584.81 ; 282.18,578.44 ccw(c260.12,600.5) C11.1@291.31,600.5 ; U6.1@991.37,319.63 cw(c986.43,314.7) 993.41,314.7 cw(c1000.39,314.7) U6.1@995.45,319.63 ; 993.41,307.33 ccw(c1017.33,307.33) v1@1000.41,290.41 ; U6.1@993.41,326.64 ccw(c1036.64,326.64) v1@1006.07,296.07 ; U6.1@993.41,327.58 993.41,284.59 994,284 v1(999,289)
  Top Layer w10: C11.1@299,595.26 C11.1@299,600.5 362.03,600.5 R6.2@364,602.47 402.47,602.47 444.47,644.47 U1.20@574.55,644.47 ; C11.1@309.38,590.11 cw(c334.45,565.04) 334.45,600.5 cw(c334.45,635.95) C11.1@309.38,610.88 ; 326.57,600.5 ccw(c326.57,637.92) R6.2@353.04,611.46 ; 336.09,600.5 cw(c336.09,576.52) R6.2@353.04,593.47 ; R6.2@374.96,593.47 cw(c396.67,571.76) 396.67,602.47 cw(c396.67,633.17) R6.2@374.96,611.46
  Bottom Layer w8: v1@219,234 cw(c219,209.86) 236.07,226.93 cw(c253.14,244) v1@229,244 ; v1(219,244) 269,194 567.25,194 603.25,230 910,230 924.11,244.11 924.11,265.12 939.34,280.35 990.35,280.35 v1(999,289) ; 953.97,280.35 ccw(c953.97,334.03) v1@991.93,296.07 ; 973.28,280.35 ccw(c973.28,314.72) v1@997.59,290.41
LED_BLUE: R9.2 U1.39 | length 1250.2
  Top Layer w10: R9.2@257.47,1074.32 cw(c257.47,1047.23) 276.62,1066.38 ; R9.2@257.47,1089 257.47,1085.53 324,1019 324,894 389,829 417.18,829 v1(455.37,790.82) ; R9.2@270.18,1087.03 ccw(c304.5,1087.03) 280.23,1062.77 ; v1@446.37,790.82 ccw(c424.64,790.82) 440,806.18 ccw(c455.37,821.55) v1@455.37,799.82 ; v1@634,623 ccw(c634,640.34) 646.26,628.08 ; v1@643,614 cw(c669.11,614) 650.65,632.46 ; U1.39@893.45,605.1 778.35,605.1 730.05,653.41 671.59,653.41 655.77,637.59 642.18,624 v1@639,624 ; v1@639,624 v1(634,614) 634,620.82 637.18,624 v1@639,624
  Bottom Layer w10: 444,741.65 cw(c504.53,741.65) v1@461.73,784.45 ; 444,765.79 cw(c480.39,765.79) v1@454.66,791.53 ; v1(455.37,790.82) 444,779.45 444,709 539,614 v1(634,614) ; v1@627.64,607.64 ccw(c612.27,592.27) 612.27,614 ccw(c612.27,635.73) v1@627.64,620.36
MISO: U1.16 U4.9 | length 1153.9
  Top Layer w8: U4.9@718.84,1258.92 718.84,1305.85 744,1331 v1(744,1339) ; 721.28,1308.28 ccw(c690.56,1339) v1@734,1339 ; 734.93,1321.94 ccw(c717.87,1339) v1@742,1339
  Top Layer w10: U1.16@574.55,723.21 638.21,723.21 v1(659,744) ; v1@650,744 cw(c628.27,744) 643.64,728.64 cw(c659,713.27) v1@659,735
  Bottom Layer w8: v1@651.93,751.07 ccw(c630.03,772.97) 661,772.97 ; v1@661,746 661,787 648,800 628,800 572,856 572,947 653,1028 709.77,1028 733,1051.23 733,1069.77 748.23,1085 769.77,1085 769.88,1084.88 799,1114 799,1284 v1(744,1339) ; 661,763.31 ccw(c678.31,763.31) v1@666.07,751.07 ; v1@744,1329 cw(c744,1304.86) 761.07,1321.93 cw(c778.14,1339) v1@754,1339
  Bottom Layer w10: v1(659,744) v1@661,746
MOSI: U1.17 U4.24 | length 727.6
  Top Layer w8: v1@751.93,1066.07 ccw(c734.86,1083.14) 759,1083.14 ccw(c783.14,1083.14) v1@766.07,1066.07 ; U4.24@756.36,1094.18 cw(c749.98,1087.8) 759,1087.8 ; U4.24@758.21,1103.41 759,1102.62 v1(759,1059)
  Top Layer w10: U1.17@574.55,703.53 663.53,703.53 689,729 v1(689,774) ; v1@682.64,767.64 cw(c667.27,752.27) 689,752.27 cw(c710.73,752.27) v1@695.36,767.64
  Bottom Layer w8: v1(689,774) 689,781.63 650.63,820 634.44,820 588,866.44 588,929 671,1012 716.4,1012 759,1054.6 v1(759,1059)
NetC8_1: C8.1 U2.4 | length 195.8
  Top Layer w20: U2.4@270.73,323.5 cw(c287.63,306.6) 287.63,330.5 ; U2.4@277.98,311.33 297.14,330.5 C8.1@339,330.5 ; U2.4@284.87,309.36 cw(c335.91,258.32) C8.1@335.91,330.5 ; U2.4@285.69,311.33 cw(c304.32,311.33) 291.15,324.51 ; C8.1@332.15,323.65 ccw(c315.62,307.11) 315.62,330.5 ccw(c315.62,353.88) C8.1@332.15,337.34
NetC9_1: C9.1 U3.4 | length 65
  Top Layer w25: C9.1@440.5,1089 440.5,1145.85 U3.4@446.24,1151.6
NetC13_1: C13.1 U4.10 | length 105.3
  Top Layer w12: C13.1@689.67,1325.14 cw(c666.75,1302.23) 699.16,1302.23 ; C13.1@696.56,1326.16 699.16,1323.57 U4.10@699.16,1258.92 ; 699.16,1314.77 cw(c713.82,1314.77) C13.1@703.45,1325.14
NetC14_2: C14.2 U4.20 | length 181.8
  Top Layer w12: C14.2@564,1066.44 666.44,1066.44 679.47,1079.47 U4.20@679.47,1103.41 ; C14.2@572.86,1059.55 cw(c589.5,1042.91) 589.5,1066.44 cw(c589.5,1089.97) C14.2@572.86,1073.33
NetCONN1_3: CONN1.3 FIL3.1 | length 140.4
  Top Layer w10: CONN1.3@201.84,759.79 259.79,759.79 283.69,783.69 FIL3.1@306.52,783.69 ; CONN1.3@225.35,754.97 cw(c236.98,743.34) 236.98,759.79 cw(c236.98,776.23) CONN1.3@225.35,764.6
NetCONN1_4: CONN1.4 FIL3.3 | length 140.4
  Top Layer w10: CONN1.4@201.84,720.42 260.42,720.42 284.32,744.32 FIL3.3@306.52,744.32 ; CONN1.4@225.35,715.6 cw(c236.98,703.97) 236.98,720.42 cw(c236.98,736.86) CONN1.4@225.35,725.23
NetCONN1_5: CONN1.5 FIL2.1 | length 137.8
  Top Layer w10: CONN1.5@201.84,681.05 261.05,681.05 278.69,698.69 FIL2.1@306.52,698.69 ; CONN1.5@225.35,676.23 cw(c236.98,664.6) 236.98,681.05 cw(c236.98,697.49) CONN1.5@225.35,685.86
NetCONN1_6: CONN1.6 FIL2.3 | length 137.8
  Top Layer w10: CONN1.6@201.84,641.68 256.68,641.68 274.32,659.32 FIL2.3@306.52,659.32 ; CONN1.6@225.35,636.86 cw(c236.98,625.23) 236.98,641.68 cw(c236.98,658.12) CONN1.6@225.35,646.49
NetCONN1_7: CONN1.7 FIL1.1 | length 864.3
  Top Layer w10: CONN1.7@201.84,602.31 235.69,602.31 ; CONN1.7@219.55,605.34 cw(c224.8,589.23) 236.79,601.21 ; CONN1.7@222.65,595.83 cw(c230.47,571.85) 248.31,589.69 ; CONN1.7@225.63,597.79 cw(c235.69,588.85) 235.69,602.31 ; CONN1.7@225.63,606.83 ccw(c235.69,615.76) 235.69,602.31 ; FIL1.1@291.52,948.69 252.5,948.69 245.18,956 181,956 131.69,906.69 131.69,847.03 84,799.34 84,614 164,534 239,534 248.31,543.31 248.31,589.69 ; 235.69,602.31 248.31,589.69
NetCONN1_8: CONN1.8 FIL1.3 | length 574.3
  Top Layer w10: CONN1.8@178.32,558.12 ccw(c166.69,546.49) 166.69,562.94 ccw(c166.69,579.38) CONN1.8@178.32,567.75 ; CONN1.8@201.84,562.94 165.06,562.94 104.53,623.47 104.53,794.41 149.69,839.58 149.69,874.69 177,902 245.18,902 252.5,909.32 FIL1.3@291.52,909.32
NetCONN2_4: CONN2.4 R10.2 U6.2 | length 346.7
  Top Layer w10: CONN2.4@1014.97,225.35 ccw(c1005.24,235.08) 1019,235.08 ; U6.2@1017.66,320.34 cw(c1009.61,312.29) 1021,312.29 ; 1019,238.88 ccw(c1038.13,238.88) CONN2.4@1024.6,225.35 ; U6.2@1019,327.58 1021,325.58 1021,305.18 1026,300.18 1026,277.82 1019,270.82 1019,202.62 CONN2.4@1019.79,201.84 1119.63,201.84 R10.2@1124,197.47 ; CONN2.4@1024.6,197.02 cw(c1036.23,185.39) 1036.23,201.84 cw(c1036.23,218.28) CONN2.4@1024.6,206.65 ; 1083.19,201.84 cw(c1083.19,166.69) R10.2@1108.04,191.54 ; 1089.47,201.84 ccw(c1089.47,228.09) R10.2@1108.04,209.53
NetD2_1: D2.1 R1.2 | length 131
  Top Layer w20: D2.1@125.5,1009 R1.2@190.53,1009 ; D2.1@132.35,1002.15 cw(c148.88,985.62) 148.88,1009 cw(c148.88,1032.38) D2.1@132.35,1015.85 ; R1.2@185.08,1003.54 ccw(c171.91,990.37) 171.91,1009 ccw(c171.91,1027.63) R1.2@185.08,1014.46
NetD5_1: D5.1 R9.1 | length 131
  Top Layer w20: D5.1@125.5,1089 R9.1@190.53,1089 ; D5.1@132.35,1082.15 cw(c148.88,1065.62) 148.88,1089 cw(c148.88,1112.38) D5.1@132.35,1095.85 ; R9.1@185.08,1083.54 ccw(c171.91,1070.37) 171.91,1089 ccw(c171.91,1107.63) R9.1@185.08,1094.46
NetU1_26: U1.26 U9.6 | length 350.9
  Top Layer w10: U9.6@573.2,344.18 ccw(c561.57,332.56) 561.57,349 ccw(c561.57,365.44) U9.6@573.2,353.82 ; U9.6@609.51,349 554,349 535.2,367.8 535.2,425.2 569,459 629,459 645.42,475.42 U1.26@645.42,514.55 ; 639.44,469.44 ccw(c625.53,483.35) U1.26@645.2,483.35